# Altium PCB Mako DSP R1.5.PcbDoc (part 1 of 2)
Units mil, origin at the board's own origin, x right, y up, seen from the top; angles counter-clockwise.
Board outline 4440 x 2100 mil, 4 copper layers (Top Layer, GND, Power, Bottom Layer); 164 components, 146 nets, 633 pads, 238 vias.
Unrouted connection lines stored in the file: 45.
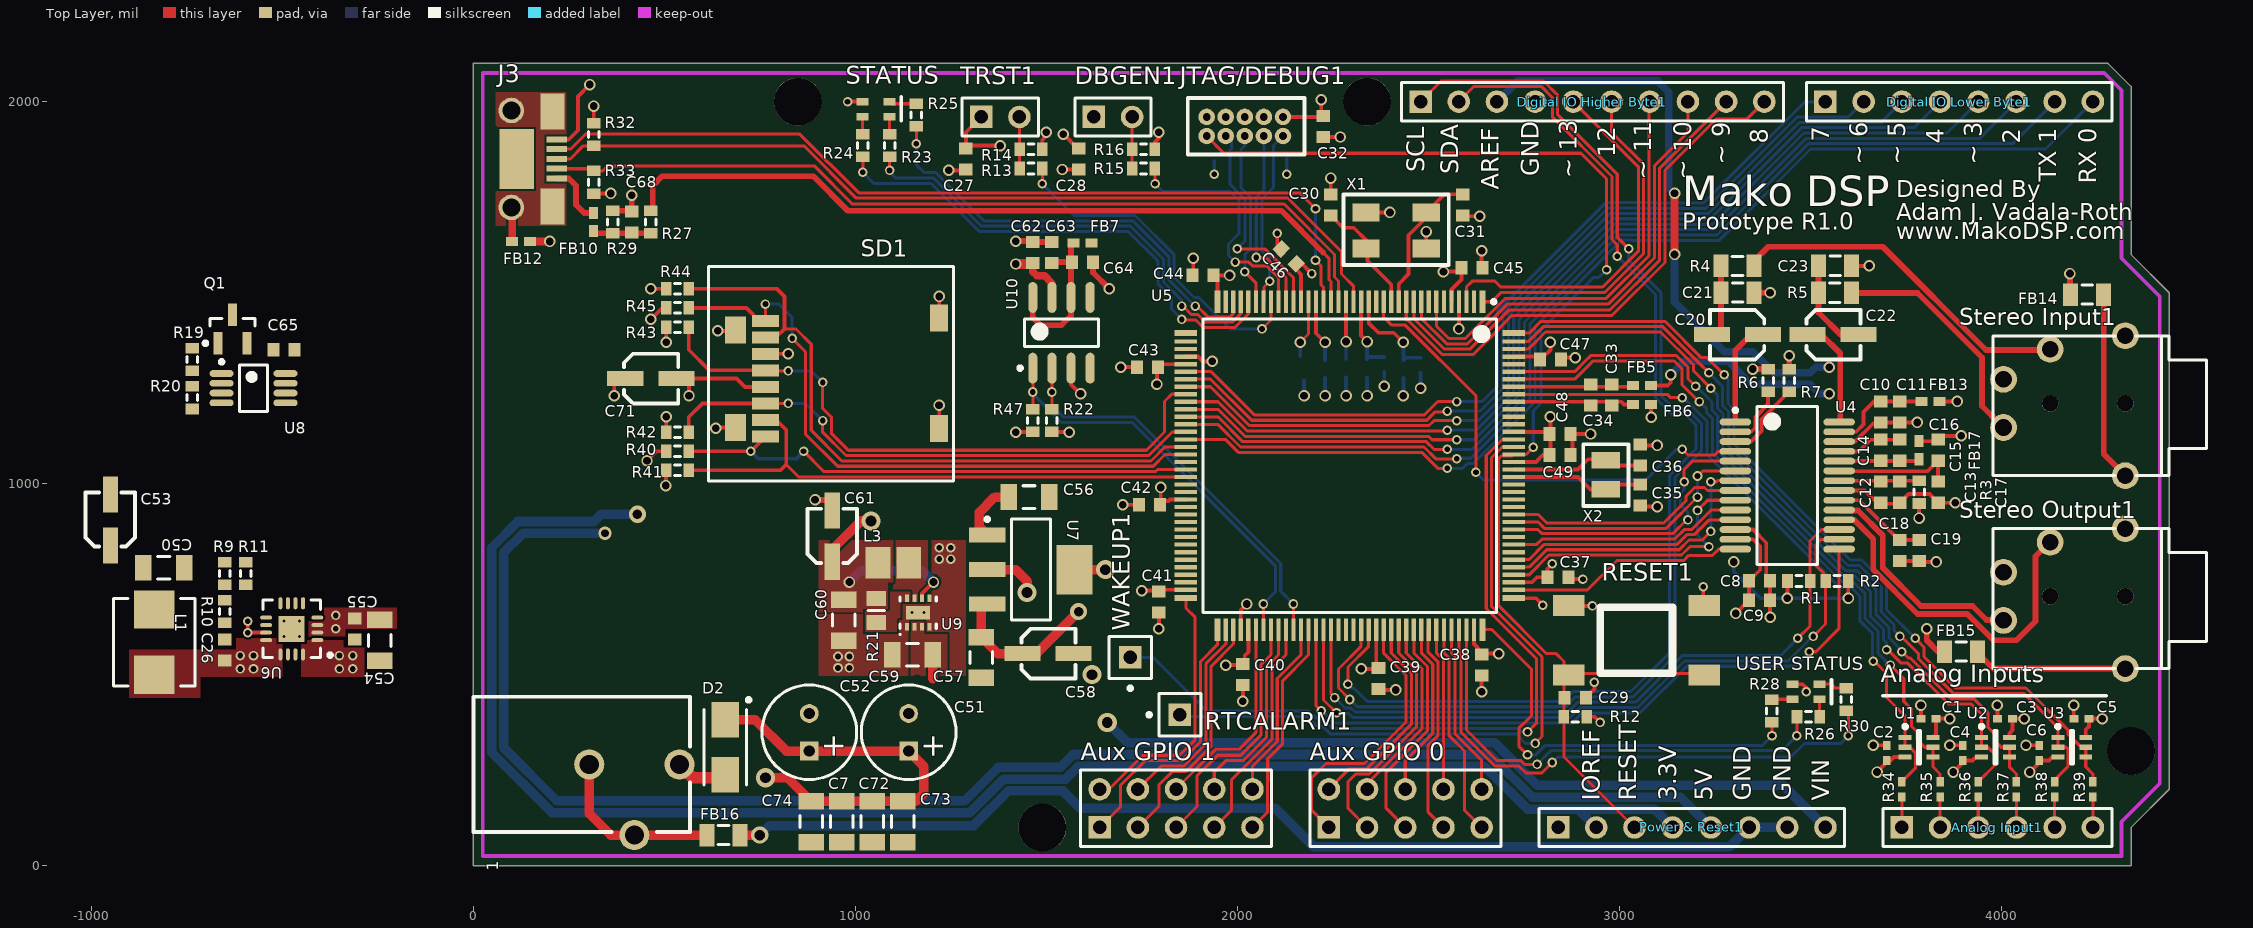
[diagram p0: Top Layer view]
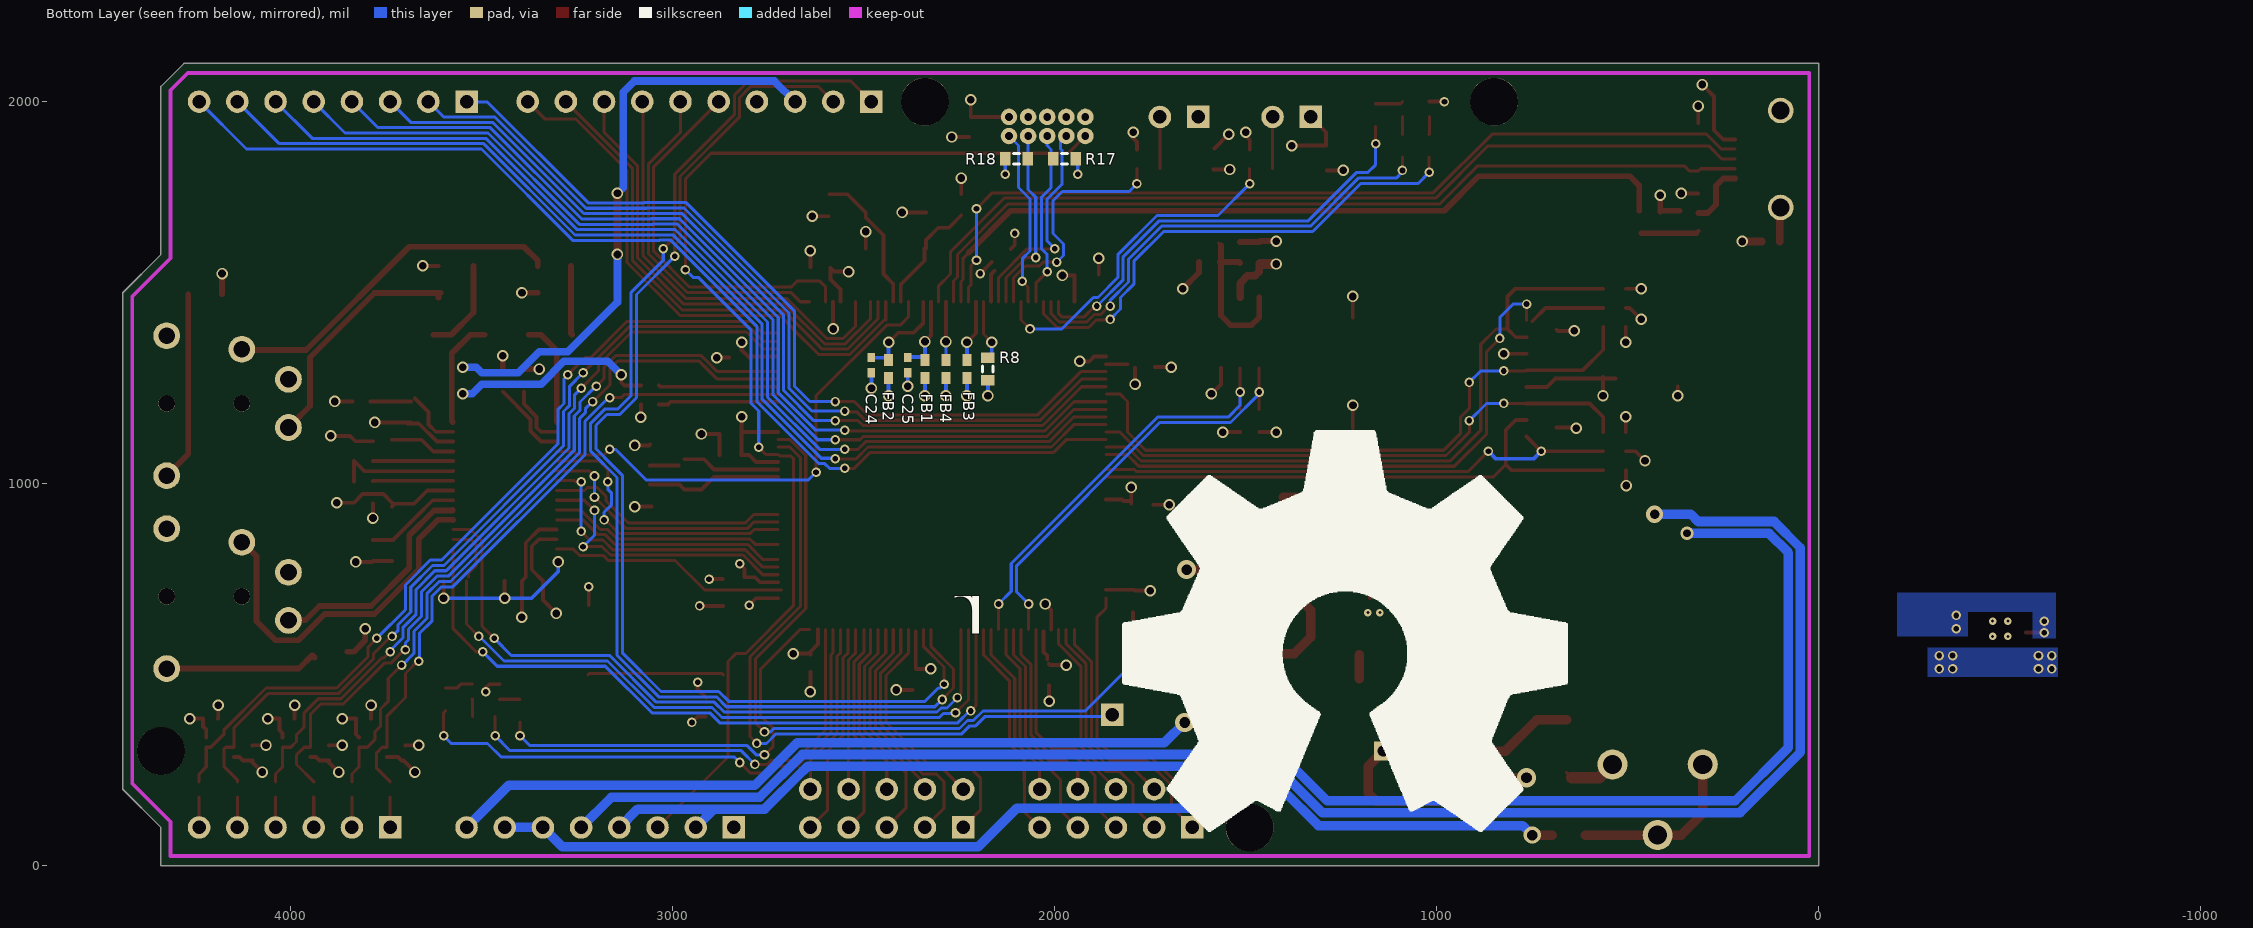
[diagram p1: Bottom Layer view, seen from below]
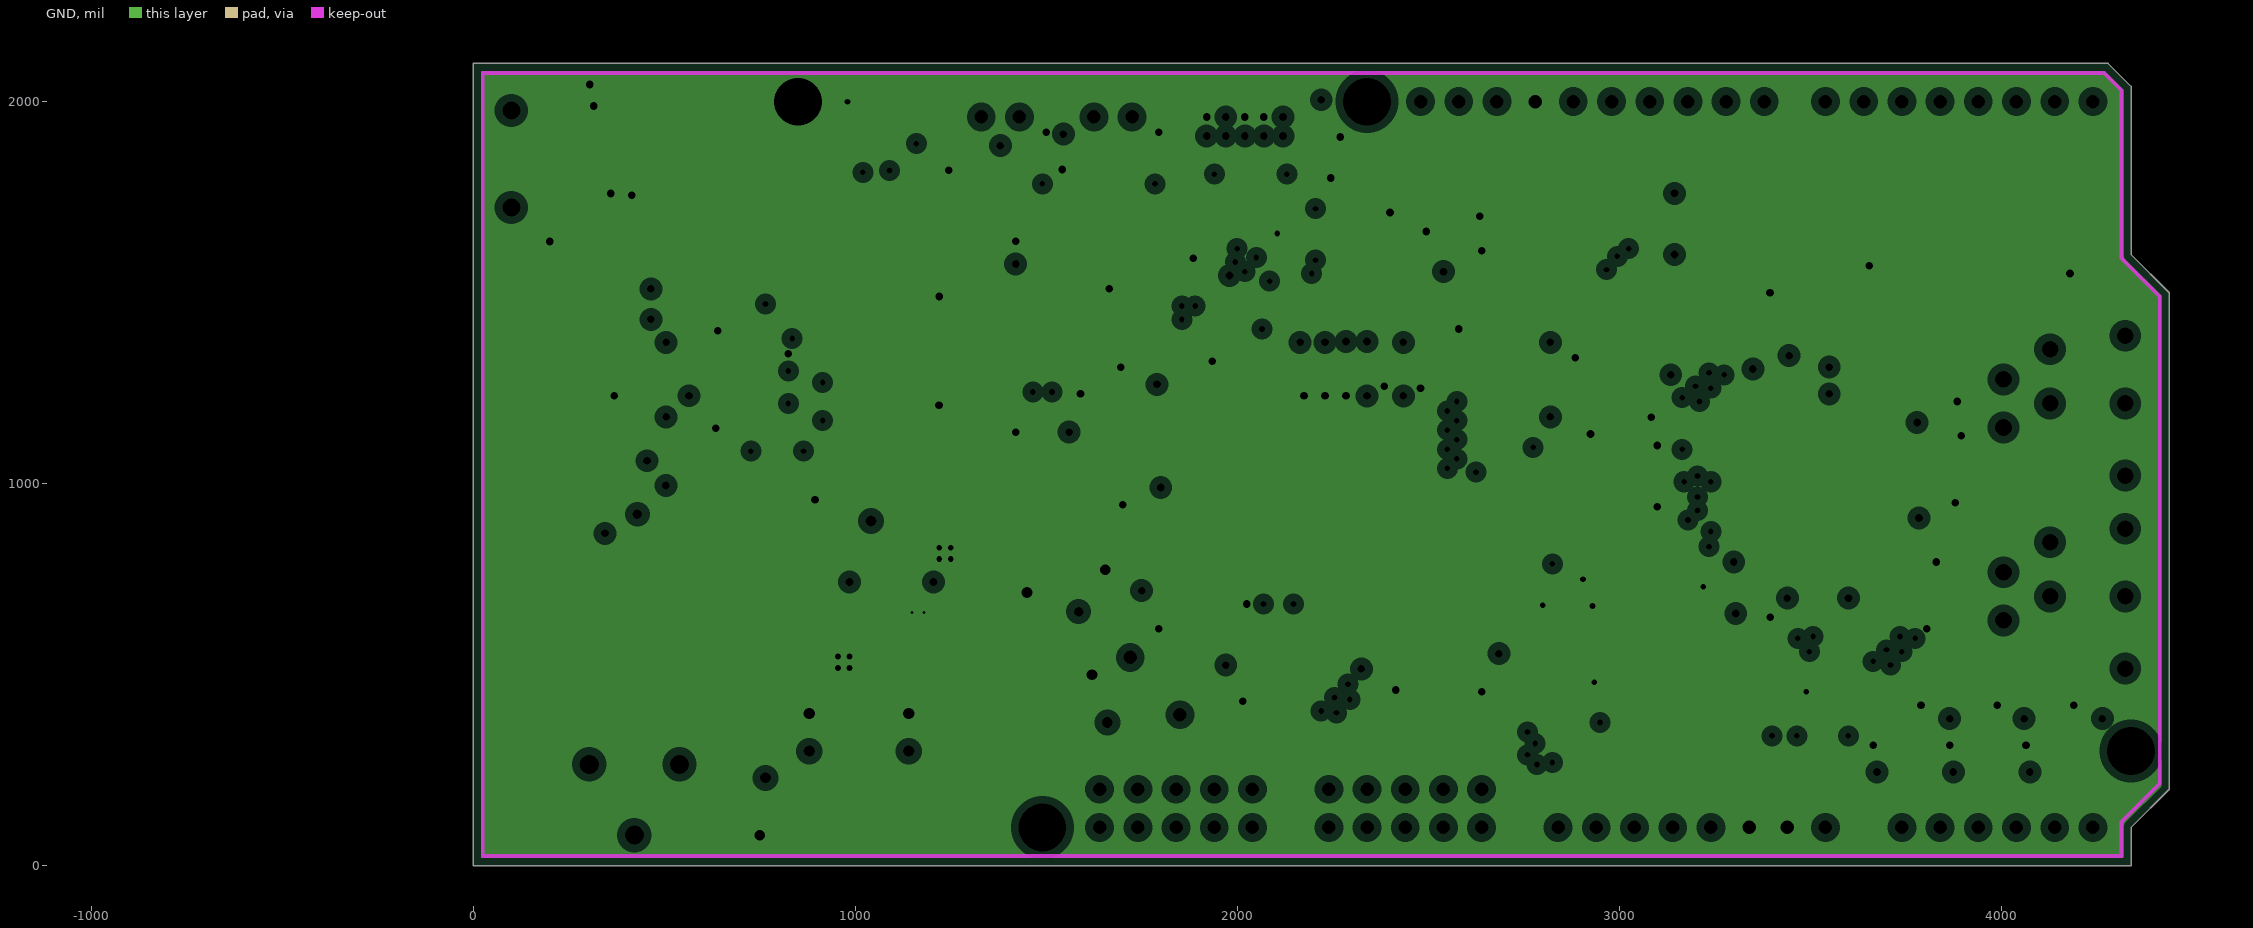
[diagram p2: GND, clearances drawn from the general rule]
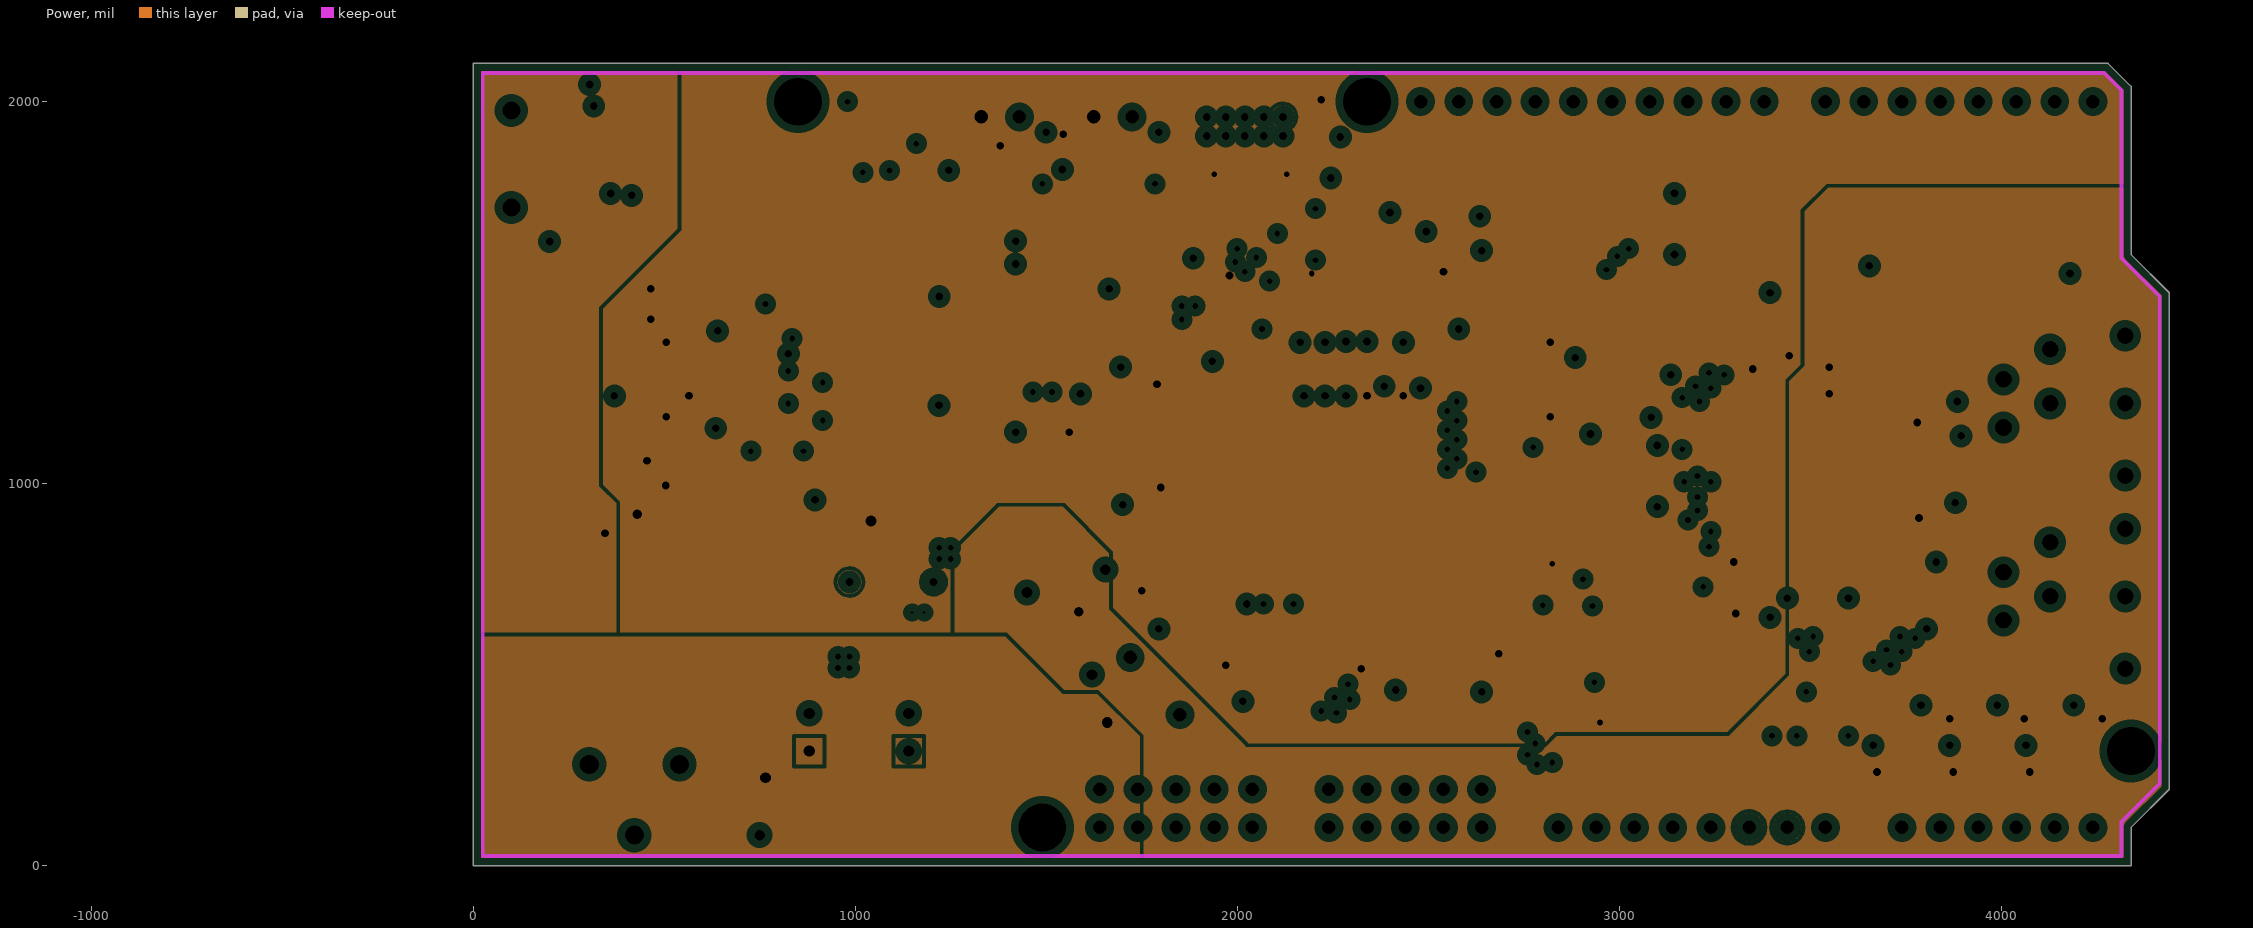
[diagram p3: Power, clearances drawn from the general rule]

## Layer stack, top to bottom
Top Layer: signal copper 1.4
Dielectric: core 12.6, FR-4, Dk 4.8
GND: plane copper 1.4, net GND
Dielectric: prepreg 12.6, FR-4, Dk 4.8
Power: plane copper 1.4, net (Multiple Nets)
Dielectric: core 12.6, FR-4, Dk 4.8
Bottom Layer: signal copper 1.4

## Board outline
0,0 0,2100 4280,2100 4340,2040 4340,1600 4440,1500 4440,200 4340,100 4340,0

## Design rules (kind name [scope] priority, off if disabled: settings)
Clearance [All] p1: gap=6
ComponentClearance [All] p1: gap=0 collisioncheckmode=3 verticalgap=10 showdistances=FALSE
DiffPairsRouting [All] p1: maxlimit=10 minlimit=10 mostfreqgap=10 maxuncoupledlength=500
FanoutControl Fanout_SOIC [(InComponent('U8') AND InComponent('U7'))] p3: bgadir=Out bgaviamode=Centered fanoutstyle=Staggered fanoutdirection=Alternating viagrid=1 // Fanout_SOIC (Default Rule)
FanoutControl Fanout_Small [All] p4: bgadir=Out bgaviamode=Centered fanoutstyle=Auto fanoutdirection=Alternating viagrid=1 // Fanout_Small (Default Rule)
HoleSize [All] p1: absolutevalues=TRUE maxlimit=120 minlimit=1 maxpercent=80.000 minpercent=20.000
MinimumSolderMaskSliver [All] p1 off: minsoldermaskwidth=10
PlaneClearance [All] p1: clearance=20
PlaneConnect [All] p1: planeconnectstyle=Direct reliefexpansion=20 reliefentries=4 reliefconductorwidth=10 reliefairgap=10
PolygonConnect [All] p1: connectstyle=Direct reliefconductorwidth=45 reliefentries=4 polygonreliefangle="90 Angle" airgapwidth=10
RoutingVias [All] p1: holewidth=15 width=25 viastyle="Through Hole" minholewidth=15 minwidth=25 maxholewidth=28 maxwidth=50
SilkToSilkClearance [All] p1 off: silktosilkclearance=10
SilkToSolderMaskClearance SilkscreenOverComponentPads [IsPad] p1 off: minsilkscreentomaskgap=10 clearancetoexposedcopper=TRUE
SolderMaskExpansion [All] p1: expansion=4
Width [All] p1: maxlimit=30 minlimit=6 preferedwidth=6 minimp=50.000000 maximp=50.000000 favimp=50.000000
18 further rules are at their usual default settings.

## Classes and differential pairs
component class "Mako DSP USBR1.2": C62 C63 C64 C68 FB7 FB10 FB12 J3 R22 R27 R29 R32 R33 R47 U10
component class "Mako DSP Main R1.2": C24 C25 C27 C28 C29 C30 C31 C32 C33 C34 C35 C36 C37 C38 C39 C40 C41 C42 C43 C44 C45 C46 C47 C48 C49 C71 DBGEN1 FB1 FB2 FB3 FB4 FB5 FB6 "ISP PGM" JTAG/DEBUG1 R8 R12 R13 R14 R15 R16 R17 R18 R23 R24 R25 R26 R28 R30 R40 R41 R42 R43 R44 R45 RESET RESET1 RTCALARM1 SD1 STATUS TRST1 U5 "USER STATUS" WAKEUP1 X1 X2
component class "Mako DSP Audio Codec R1.2": C8 C9 C10 C11 C12 C13 C14 C15 C16 C17 C18 C19 C20 C21 C22 C23 FB13 FB14 FB15 FB17 R1 R2 R3 R4 R5 R6 R7 "Stereo Input1" "Stereo Input?" "Stereo Output1" "Stereo Output?" U4
component class "Mako DSP Arduio IO R1.2": "Analog Input1" "Analog Input?" "Aux GPIO 0" "Aux GPIO 1" C1 C2 C3 C4 C5 C6 "Digital IO Higher Byte1" "Digital IO Higher Byte?" "Digital IO Lower Byte1" "Digital IO Lower Byte?" "Power & Reset1" "Power & Reset?" R34 R35 R36 R37 R38 R39 SSP? U1 U2 U3
component class "Mako DSP Power R1.3": 1 12VDC/VCCIN C7 C26 C50 C51 C52 C53 C54 C55 C56 C57 C58 C59 C60 C61 C65 C72 C73 C74 D2 D? FB16 L1 L3 Q1 R9 R10 R11 R19 R20 R21 U6 U7 U8 U9
differential pair USB0: +USB0_P -USB0_N

## Components (designator, comment, footprint, x,y, rotation, side; value= is the part's Value field where it differs from the comment)
1 "Center-positive 2.1 mm power jack" PJ-102AH 540,265 r90 top
"Analog Input1" "Arduino Leonardo Analog" "Arduino Leonardo Analog" 3740,100 r0 top locked
"Aux GPIO 0" "Header 5X2" HDR2X5 2240,100 r0 top locked
"Aux GPIO 1" "Header 5X2" HDR2X5 1640,100 r0 top locked
C1 "Cap Semi" 0402 3810,385 r0 top
C2 "Cap Semi" 0402 3700,295 r270 top
C3 "Cap Semi" 0402 4010,385 r0 top
C4 "Cap Semi" 0402 3900,295 r270 top
C5 "Cap Semi" 0402 4210,385 r0 top
C6 "Cap Semi" 0402 4100,295 r270 top
C7 "Cap Semi" C1206 965,115 r90 top
C8 "Cap Semi" 1608[0603] 3367.56,745.31 r180 top
C9 "Cap Semi" 1608[0603] 3367.56,695.31 r180 top
C10 "Cap Semi" 1608[0603] 3685,1187.56 r270 top
C11 "Cap Semi" 1608[0603] 3735,1187.56 r270 top
C12 "Cap Semi" 1608[0603] 3685,977.56 r90 top
C13 "Cap Semi" 1608[0603] 3735,977.56 r90 top
C14 "Cap Semi" 1608[0603] 3685,1087.56 r90 top
C15 "Cap Semi" 1608[0603] 3735,1087.56 r90 top
C16 "Cap Semi" 1608[0603] 3835,1087.56 r270 top
C17 "Cap Semi" 1608[0603] 3835,977.56 r90 top
C18 "Cap Semi" 1608[0603] 3735,825 r90 top
C19 "Cap Semi" 1608[0603] 3785,825 r90 top
C20 "Cap Semi" "Panasonic VS B" 3310,1390 r0 top
C21 "Cap Semi" "SM 0805 - gap trimmed" 3310,1500 r180 top
C22 "Cap Semi" "Panasonic VS B" 3560,1390 r180 top
C23 "Cap Semi" "SM 0805 - gap trimmed" 3565,1570 r180 top
C24 "Cap Semi" 0402 2480,1310 r90 bottom
C25 "Cap Semi" 0402 2385,1310 r90 bottom
C26 "Cap Semi" 1608[0603] -650,565 r90 top
C27 "Cap Semi" CAPC1608L 1290,1850 r90 top
C28 "Cap Semi" CAPC1608L 1585,1850 r90 top
C29 "Cap Semi" CAPC1608L 2885,440 r180 top
C30 "Cap Semi" 1608[0603] 2245,1730 r90 top
C31 "Cap Semi" 1608[0603] 2590,1730 r90 top
C32 "Cap Semi" CAPC1608L 2225,1935 r270 top
C33 "Cap Semi" 1608[0603] 2980,1232.05 r90 top
C34 "Cap Semi" 1608[0603] 2925,1232.05 r90 top
C35 "Cap Semi" 1608[0603] 3055,970 r90 top
C36 "Cap Semi" 1608[0603] 3055,1075 r270 top
C37 "Cap Semi" 1608[0603] 2840,755 r180 top
C38 "Cap Semi" 1608[0603] 2640,525 r90 top
C39 "Cap Semi" 1608[0603] 2370,490 r90 top
C40 "Cap Semi" 1608[0603] 2015,500 r90 top
C41 "Cap Semi" 1608[0603] 1795,690 r90 top
C42 "Cap Semi" 1608[0603] 1770,945 r0 top
C43 "Cap Semi" 1608[0603] 1765,1305 r0 top
C44 "Cap Semi" 1608[0603] 1910,1545 r0 top
C45 "Cap Semi" 1608[0603] 2615,1565 r180 top
C46 "Cap Semi" 1608[0603] 2135,1595 r315 top
C47 "Cap Semi" 1608[0603] 2820,1325 r180 top
C48 "Cap Semi" 1608[0603] 2845,1130 r180 top
C49 "Cap Semi" 1608[0603] 2845,1075 r180 top
C50 "Cap Semi" C1206 -810,780 r180 top
C51 "Cap Pol1" CAPPR2.5-6.3x5 1140,349.21 r90 top
C52 "Cap Pol1" CAPPR2.5-6.3x5 880,349.21 r90 top
C53 "Cap Semi" "Panasonic VS B" -950,905 r270 top
C54 "Cap Semi" C1206 -245,590 r90 top
C55 "Cap Semi" 1608[0603] -310,620 r90 top
C56 "Cap Semi" C1206 1455,965 r0 top
C57 "Cap Semi" C1206 1330,545 r270 top
C58 "Cap Semi" "Panasonic VS B" 1505,555 r180 top
C59 "Cap Semi" C1206 1150,552.5 r0 top
C60 "Cap Semi" C1206 970,642.5 r90 top
C61 "Cap Semi" "Panasonic VS B" 940,862.5 r270 top
C62 "Cap Semi" 1608[0603] 1465,1605 r270 top
C63 "Cap Semi" 1608[0603] 1515,1605 r270 top
C64 "Cap Semi" 1608[0603] 1595,1580 r180 top
C65 "Cap Semi" 1608[0603] -495,1350 r180 top
C68 "Cap Semi" 1608[0603] 415,1684.74 r270 top
C71 "Cap Semi" "Panasonic VS B" 465,1275 r180 top
C72 "Cap Semi" C1206 1045,115 r90 top
C73 "Cap Semi" C1206 1125,115 r90 top
C74 "Cap Semi" C1206 885,115 r90 top
D2 "PMEG4050EP" PMEG4050EP 660,310 r270 top
DBGEN1 "Header 2" HDR1X2 1625,1960 r0 top
"Digital IO Higher Byte1" "Arduino Leonardo High Byte" "Arduino Leonardo High Byte" 2480,2000 r0 top locked
"Digital IO Lower Byte1" "Arduino Leonardo Low Byte" "Arduino Leonardo Low Byte" 3540,2000 r0 top locked
FB1 "BLM15HG601SN1D" BLM18PG121SN1D 2340,1300 r90 bottom
FB2 "BLM15HG601SN1D" BLM18PG121SN1D 2435,1300 r90 bottom
FB3 "BLM15HG601SN1D" BLM18PG121SN1D 2230,1300 r270 bottom
FB4 "BLM15HG601SN1D" BLM18PG121SN1D 2285,1300 r270 bottom
FB5 "BLM15HG601SN1D" BLM18PG121SN1D 3060,1257.05 r180 top
FB6 "BLM15HG601SN1D" BLM18PG121SN1D 3060,1207.05 r180 top
FB7 "BLM15HG601SN1D" BLM18PG121SN1D 1595,1630 r0 top
FB10 "BLM15HG601SN1D" BLM18PG121SN1D 315,1684.74 r90 top
FB12 "BLM15HG601SN1D" BLM18PG121SN1D 125.58,1634.02 r0 top
FB13 "BLM15HG601SN1D" BLM18PG121SN1D 3815.16,1215.16 r0 top
FB14 "Ferrite" "SM 0805 - gap trimmed" 4225,1495 r180 top
FB15 "Ferrite" "SM 0805 - gap trimmed" 3895,560 r180 top
FB16 "Ferrite" "SM 0805 - gap trimmed" 655,80 r180 top
FB17 "BLM15HG601SN1D" BLM18PG121SN1D 3785,1087.56 r90 top
J3 "DX4R005J91R5100" "Micro USB Circular Holes Only" 60.57,1849.02 r270 top
JTAG/DEBUG1 "S9015E-05-ND" S9015E-05-ND 1920,1960 r0 top
L1 "Inductor" CIP0530LR3R3 -835,585 r90 top
L3 "Inductor" VLS252012T-2R2M1R3 1100,792.5 r180 top
"Power & Reset1" "Arduino Leonardo Power" "Arduino Leonardo Power" 2840,100 r0 top locked
Q1 "FDN340P" SOT23-3N -630,1405 r90 top
R1 "Res3" J1-0603 3470.16,745.16 r180 top
R2 "Res3" J1-0603 3570.16,745.16 r0 top
R3 "Res3" J1-0603 3785,977.56 r270 top
R4 "Res3" "SM 0805 - gap trimmed" 3310,1570 r0 top
R5 "Res3" "SM 0805 - gap trimmed" 3565,1500 r0 top
R6 "Res3" J1-0603 3390,1270 r270 top
R7 "Res3" J1-0603 3445,1270 r270 top
R8 "Res3" J1-0603 2175,1300 r90 bottom
R9 "Res3" J1-0603 -650,765 r270 top
R10 "Res3" J1-0603 -650,665 r270 top
R11 "Res3" J1-0603 -595,765 r90 top
R12 "Res3" J1-0603 2885,390 r0 top
R13 "Res3" J1-0603 1460,1825 r180 top
R14 "Res3" J1-0603 1460,1875 r180 top
R15 "Res3" J1-0603 1755,1825 r180 top
R16 "Res3" J1-0603 1755,1875 r180 top
R17 "Res3" J1-0603 1975,1850 r180 bottom
R18 "Res3" J1-0603 2100,1850 r0 bottom
R19 "Res3" J1-0603 -735,1325 r90 top
R20 "Res3" J1-0603 -735,1225 r90 top
R21 "Res3" RESC2012L 1055,667.5 r90 top
R22 "Res3" J1-0603 1515,1165 r90 top
R23 "Res3" J1-0603 1090,1885 r90 top
R24 "Res3" J1-0603 1020,1885 r270 top
R25 "Res3" J1-0603 1160,1965 r90 top
R26 "Res3" J1-0603 3495,390 r0 top
R27 "Res3" J1-0603 465,1684.74 r90 top
R28 "Res3" J1-0603 3400,405 r270 top
R29 "Res3" J1-0603 365,1684.74 r90 top
R30 "Res3" J1-0603 3595,435 r90 top
R32 "Res3" J1-0603 315.58,1914.02 r90 top
R33 "Res3" J1-0603 315.58,1789.02 r270 top
R34 "Res3" "0402 - duplicate" 3740,200 r90 top
R35 "Res3" "0402 - duplicate" 3840,200 r90 top
R36 "Res3" "0402 - duplicate" 3940,200 r90 top
R37 "Res3" "0402 - duplicate" 4040,200 r90 top
R38 "Res3" "0402 - duplicate" 4140,200 r90 top
R39 "Res3" "0402 - duplicate" 4240,200 r90 top
R40 "Res3" J1-0603 535,1085 r0 top
R41 "Res3" J1-0603 535,1035 r0 top
R42 "Res3" J1-0603 535,1135 r0 top
R43 "Res3" J1-0603 535,1410 r0 top
R44 "Res3" J1-0603 535,1510 r0 top
R45 "Res3" J1-0603 535,1460 r0 top
R47 "Res3" J1-0603 1465,1165 r90 top
RESET1 "Tactile Switch" TL3301 3045,590 r90 top
RTCALARM1 "Socket" PIN1 1850,395 r90 top
SD1 "JAE SJ107021" "JAE SJ107021" 1220,1274.53 r0 top
STATUS "APTF1616SEEZGQBDC" "RGB LED APTF1616SEEZGQBDC" 1090,2000 r180 top
"Stereo Input1" "CUI 43515TS" "CUI SJ-43515TS" 4325,1210 r180 top
"Stereo Output1" "CUI 43515TS" "CUI SJ-43515TS" 4325,705 r180 top
TRST1 "Header 2" HDR1X2 1330,1960 r0 top
U1 "BAV70S SOT-363" BAV70S_SOT363 3785,310 r0 top
U2 "BAV70S SOT-363" BAV70S_SOT363 3985,310 r0 top
U3 "BAV70S SOT-363" BAV70S_SOT363 4185,310 r0 top
U4 "WM8778" WM8778 3440,995 r0 top
U5 "LPC4330FBD144" SOT486-1_V 2295,1047.05 r270 top
U6 "MIC24085" MIC24085-AYML -475,620 r180 top
U7 "TLV117113" TLV117112 1460,775 r0 top
U8 "Ti LM358 SOP" LM358 -575,1250 r0 top
U9 "TPS62162SOP" DSG8-1600X900TP 1165,662.5 r90 top
U10 "LM3525" LM3525 1540,1395 r90 top
"USER STATUS" "APTF1616SEEZGQBDC" "RGB LED APTF1616SEEZGQBDC" 3525,475 r180 top
WAKEUP1 "Socket" PIN1 1720,545 r180 top
X1 "ABM3B-12.000MHZ-B2-T" ABM3B-12.000MHZ-B2-T 2495,1710 r180 top
X2 "ABS07-32.768KHZ-T" ABS07-32.768KHZ-T 2965,985 r90 top

## Footprints (in the part's own frame and the unit in brackets; to place one, negate y for a bottom-side part, rotate by r counter-clockwise, add the part's x,y. Pads: shape width x height; smd on the part's side, far side on the other; paste and mask are expansions set on the pad)
0402 [mm] "Chip Capacitor, Body 1.0x0.5mm, IPC High Density"
  rect 0.6x0.5 smd: 1(-0.5,0) 2(0.5,0)
  body extent -0.55,-0.3 0.55,0.3, height 1.3
"0402 - duplicate" [mm] "Chip Capacitor, Body 1.0x0.5mm, IPC High Density"
  rect 0.6x0.5 smd: 1(-0.5,0) 2(0.5,0)
  body extent -0.55,-0.3 0.55,0.3, height 1.3
1608[0603] [mm] "Chip Capacitor, Body 1.6x0.8mm, IPC High Density"
  rect 0.8x0.9 smd: 1(-0.7,0) 2(0.7,0)
  body extent -0.87,-0.48 0.87,0.48, height 1.3
ABM3B-12.000MHZ-B2-T [mm] "ABM3B-12.000MHZ-B2-T 12MHZ Crystam Oscillator"
  rect 1.8x1.2 smd: 1(0,0) 2(4,0) 3(4,2.4) 4(0,2.4)
  silkscreen extent -1.5,-1.2 5.5,3.5
ABS07-32.768KHZ-T [mm] "ABS07-32.768KHZ-T Crystal Oscillator"
  rect 1.1x1.9 smd: 1(0,0) 2(1.95,0)
  silkscreen extent -1.1,-1.5 3,1.5
"Arduino Leonardo Analog" [mm] "Connector; Header; 6 Position"
  rect 1.5x1.5 hole 0.9: 1(0,0)
  round 1.5 hole 0.9: 2(2.54,0) 3(5.08,0) 4(7.62,0) 5(10.16,0) 6(12.7,0)
  silkscreen extent -1.27,-1.27 13.97,1.27
"Arduino Leonardo High Byte" [mm]
  rect 1.5x1.5 hole 0.9: 1(0,0)
  round 1.5 hole 0.9: 2(2.54,0) 3(5.08,0) 4(7.62,0) 5(10.16,0) 6(12.7,0) 7(15.24,0) 8(17.78,0) 9(20.32,0) 10(22.86,0)
  silkscreen extent -1.27,-1.27 24.13,1.27
"Arduino Leonardo Low Byte" [mm] "Connector; Header; 8 Position"
  rect 1.5x1.5 hole 0.9: 1(0,0)
  round 1.5 hole 0.9: 2(2.54,0) 3(5.08,0) 4(7.62,0) 5(10.16,0) 6(12.7,0) 7(15.24,0) 8(17.78,0)
  silkscreen extent -1.27,-1.27 19.05,1.27
"Arduino Leonardo Power" [mm] "Connector; Header; 8 Position"
  rect 1.5x1.5 hole 0.9: 1(0,0)
  round 1.5 hole 0.9: 2(2.54,0) 3(5.08,0) 4(7.62,0) 5(10.16,0) 6(12.7,0) 7(15.24,0) 8(17.78,0)
  silkscreen extent -1.27,-1.27 19.05,1.27
BAV70S_SOT363 [mm] "SOT23, 6-Leads, Body 2.2x2.2mm (max), Pitch 0.65mm, IPC Medium Density"
  rect 0.85x0.35 smd: 1(-0.925,0.65) 2(-0.925,0) 3(-0.925,-0.65) 4(0.925,-0.65) 5(0.925,0) 6(0.925,0.65)
  silkscreen extent -1.05,-1.1 0.1,1.5, body extent -0.67,-1.1 0.67,1.1, height 1.1
BLM18PG121SN1D [mm] "Chip Inductor, 2-Leads, Body 1.0x0.5mm, IPC Medium Density"
  rect 0.8x0.6 smd: 1(-0.6,0) 2(0.6,0)
  body extent -0.52,-0.28 0.53,0.27, height 0.6
C1206 [mm] "Chip Capacitor, Body 3.2x1.6mm, IPC High Density"
  rect 1.1x1.7 smd: 1(-1.35,0) 2(1.35,0)
  silkscreen extent -0.4,-0.75 0.4,0.75, body extent -1.7,-0.9 1.7,0.9, height 1.3
CAPC1608L [mm] "Chip Capacitor, Body 1.6x0.8mm, IPC High Density"
  rect 0.8x0.9 smd: 1(-0.7,0) 2(0.7,0)
  body extent -0.87,-0.48 0.87,0.48, height 0.85
CAPPR2.5-6.3x5 [mm] "Capacitor, Electrolytic, Radial; Body 6.3 x 5 mm (Dia.xH typ); Pin Spacing 2.5 mm (typ)"
  rect 1.25x1.25 hole 0.75: 1(-1.25,0)
  round 1.25 hole 0.75: 2(1.25,0)
  silkscreen extent -3.15,-3.15 3.15,3.15
CIP0530LR3R3 [mm] "Precision Wire Wound Inductor, 2-Leads, Body 5.58x5.30mm, IPC Medium Density"
  rect 2.55x2.7 smd: 1(-2.175,0) 2(2.175,0)
  silkscreen extent -2.9,-2.7 2.9,2.7, body extent -2.88,-2.7 2.88,2.7, height 2.29
"CUI SJ-43515TS" [mm]
  round 1.778 hole 1.1: 1(8.1,1.6) 3(8.1,-1.6) 4(5,-3.6) 5(0,4.8) 6(0,-4.5)
  round 1.1 hole 1.1: ""(0,0) ""(5,0)
  silkscreen extent -5.4,-4.5 8.8,4.8
DSG8-1600X900TP [mm] "SON, 8-Leads, Body 2x2mm, Pitch 0.5mm, Thermal Pad 1.6x0.9mm, TI Recommended"
  rect 0.5x0.28 smd paste-0.14 mask+0.07: 1(-0.95,0.75) 2(-0.95,0.25) 3(-0.95,-0.25) 4(-0.95,-0.75) 5(0.95,-0.75) 6(0.95,-0.25) 7(0.95,0.25) 8(0.95,0.75)
  rect 0.9x1.6 smd paste-0.45 mask+0.07: 9(0,0)
  silkscreen extent -1.5,-1.2 1.05,1.25, body extent -1.05,-1.05 1.05,1.05, height 0.8
HDR1X2 [mm] "Connector; Header; 2 Position"
  rect 1.5x1.5 hole 0.9: 1(0,0)
  round 1.5 hole 0.9: 2(2.54,0)
  silkscreen extent -1.27,-1.27 3.81,1.27
HDR2X5 [mm] "Connector; Header; 5x2 Position"
  rect 1.5x1.5 hole 0.9: 1(0,0)
  round 1.5 hole 0.9: 2(0,2.54) 3(2.54,0) 4(2.54,2.54) 5(5.08,0) 6(5.08,2.54) 7(7.62,0) 8(7.62,2.54) 9(10.16,0) 10(10.16,2.54)
  silkscreen extent -1.27,-1.27 11.43,3.81
J1-0603 [mm] "Chip Resistor, Body 1.6x0.8mm, IPC High Density"
  rect 0.7x0.9 smd: 1(-0.75,0) 2(0.75,0)
  silkscreen extent -0.2,-0.35 0.2,0.35, body extent -0.85,-0.48 0.85,0.48, height 0.9
"JAE SJ107021" [mm] "MicroSD card socket"
  rect 1.8x0.8 smd: 1(-11.55,-3.85) 2(-11.55,-2.75) 3(-11.55,-1.65) 4(-11.55,-0.55) 5(-11.55,0.55) 6(-11.55,1.65) 7(-11.55,2.75) 8(-11.55,3.85)
  rect 1.2x1.8 smd: 9(0,-3.3) 10(0,4.05)
  rect 1.4x1.8 smd: 11(-13.55,-3.25) 12(-13.55,3.25)
  silkscreen extent -15.35,-6.8 0.95,7.45, body extent -15.25,-6.75 1,7.5, height 2
LM358 [mm] "TSOP, 8-Leads, Body 3.00x3.00mm, Pitch 0.65mm, IPC Medium Density"
  oval 1.6x0.45 smd: 1(-2.125,0.975) 2(-2.125,0.325) 3(-2.125,-0.325) 4(-2.125,-0.975) 5(2.125,-0.975) 6(2.125,-0.325) 7(2.125,0.325) 8(2.125,0.975)
  silkscreen extent -2.25,-1.55 0.92,1.87, body extent -1.55,-1.55 1.55,1.55, height 1.1
LM3525 [mm]
  oval 2.05x0.6 smd: 1(-2.35,1.905) 2(-2.35,0.635) 3(-2.35,-0.635) 4(-2.35,-1.905) 5(2.35,-1.905) 6(2.35,-0.635) 7(2.35,0.635) 8(2.35,1.905)
  silkscreen extent -2.47,-2.45 0.92,2.88, body extent -1.95,-2.45 1.95,2.45, height 1.45
MIC24085-AYML [mm] "QFN, 16-Leads, Body 3.25x3.25mm, Pitch 0.50mm, Thermal Pad 1.73x1.73mm, IPC Medium Density"
  oval 0.8x0.25 smd: 1(-1.7,0.75) 2(-1.7,0.25) 3(-1.7,-0.25) 4(-1.7,-0.75) 9(1.7,-0.75) 10(1.7,-0.25) 11(1.7,0.25) 12(1.7,0.75)
  oval 0.25x0.8 smd: 5(-0.75,-1.7) 6(-0.25,-1.7) 7(0.25,-1.7) 8(0.75,-1.7) 13(0.75,1.7) 14(0.25,1.7) 15(-0.25,1.7) 16(-0.75,1.7)
  rect 1.73x1.73 smd: 17(0,0)
  silkscreen extent -2.68,-1.9 1.9,1.9, body extent -1.75,-1.75 1.75,1.75, height 0.85
"Micro USB Circular Holes Only" [mm]
  rect 0.4x1.35 smd: 1(1.275,4.025) 2(0.625,4.025) 3(-0.025,4.025) 4(-0.675,4.025) 5(-1.325,4.025)
  rect 2.4x1.6 smd: 6(3.125,3.75) 9(-3.175,3.75)
  round 1.7 hole 1.2: 7(3.2,1) 8(-3.25,1)
  rect 4x2.3 smd: GND(-0.025,1.35)
  body extent -4.1,-1.64 4.1,3.79, height 2.73
"Panasonic VS B" [mm]
  rect 2.4x1 smd: 1(1.7,0) 2(-1.7,0)
  silkscreen extent -1.83,-1.65 1.78,1.65
PIN1 [mm] "Connector; Plug"
  rect 1.5x1.5 hole 0.9: 1(0,0)
  silkscreen extent -1.4,-1.4 1.4,2.17
PJ-102AH [mm] "Center positive 2.1 mm power jack"
  round 2 hole 1.27: 1(0,0) 2(0,6) 3(-4.7,3)
  silkscreen extent -4.5,-0.7 4.5,13.7, body extent -5.8,-0.7 4.5,13.7, height 11
PMEG4050EP [mm] "PMEG4050EP NXP SMD Schottky Diode"
  rect 2.35x1.85 smd: 1(-1.825,0) 2(1.825,0)
  silkscreen extent -3.27,-1.4 2.5,1.68, body extent -2.5,-1.35 2.5,1.35, height 1.1
RESC2012L [mm] "Chip Resistor, Body 2.0x1.3mm, IPC High Density"
  rect 1x1.3 smd: 1(-0.8,0) 2(0.8,0)
  silkscreen extent 0,-0.55 0,0.55, body extent -1.07,-0.7 1.07,0.7, height 0.65
"RGB LED APTF1616SEEZGQBDC" [mm] "RGB LED"
  rect 0.8x0.5 smd: 1(1.8,0) 2(0,0) 3(0,1) 4(1.8,1)
  silkscreen extent -0.77,-0.3 -0.77,1.28
S9015E-05-ND [mm] "10 Pin Cortex JTAG Debug Header"
  round 1.1 hole 0.508: 1(5.08,0) 2(5.08,-1.27) 3(3.81,0) 4(3.81,-1.27) 5(2.54,0) 6(2.54,-1.27) 7(1.27,0) 8(1.27,-1.27) 9(0,0) 10(0,-1.27)
  round 0.5 on Top Overlay: 1(7,0.8)
  silkscreen extent -1.25,-2.5 6.5,1.25
"SM 0805 - gap trimmed" [mm]
  rect 1x1.5 smd: 1(-1.1,0) 2(1.1,0)
  silkscreen extent -0.36,-0.64 0.35,0.63
SOT23-3N [mm] "SOT23, 3-Leads, Body 2.9x1.3mm, Pitch 0.95mm, Lead Span 2.5mm, IPC Medium Density"
  rect 1.5x0.6 smd: 1(-0.95,0.95) 2(-0.95,-0.95) 3(0.95,0)
  silkscreen extent -1.07,-1.5 0.7,1.92, body extent -0.7,-1.5 0.7,1.5, height 1.1
SOT486-1_V [mm] "Thin QFP, 144-Leads, Body 20x20mm, Pitch 0.5mm, NXP Recommended"
  rect 1.5x0.4 smd: 1(-10.9,8.81) 36(-10.9,-8.81) 73(10.9,-8.81) 108(10.9,8.81)
  rect 1.5x0.28 smd: 2(-10.9,8.25) 3(-10.9,7.75) 4(-10.9,7.25) 5(-10.9,6.75) 6(-10.9,6.25) 7(-10.9,5.75) 8(-10.9,5.25) 9(-10.9,4.75) 10(-10.9,4.25) 11(-10.9,3.75) 12(-10.9,3.25) 13(-10.9,2.75) 14(-10.9,2.25) 15(-10.9,1.75) 16(-10.9,1.25) 17(-10.9,0.75) 18(-10.9,0.25) 19(-10.9,-0.25) 20(-10.9,-0.75) 21(-10.9,-1.25) 22(-10.9,-1.75) 23(-10.9,-2.25) 24(-10.9,-2.75) 25(-10.9,-3.25) 26(-10.9,-3.75) 27(-10.9,-4.25) 28(-10.9,-4.75) 29(-10.9,-5.25) 30(-10.9,-5.75) 31(-10.9,-6.25) 32(-10.9,-6.75) 33(-10.9,-7.25) 34(-10.9,-7.75) 35(-10.9,-8.25) 74(10.9,-8.25) 75(10.9,-7.75) 76(10.9,-7.25) 77(10.9,-6.75) 78(10.9,-6.25) 79(10.9,-5.75) 80(10.9,-5.25) 81(10.9,-4.75) 82(10.9,-4.25) 83(10.9,-3.75) 84(10.9,-3.25) 85(10.9,-2.75) 86(10.9,-2.25) 87(10.9,-1.75) 88(10.9,-1.25) 89(10.9,-0.75) 90(10.9,-0.25) 91(10.9,0.25) 92(10.9,0.75) 93(10.9,1.25) 94(10.9,1.75) 95(10.9,2.25) 96(10.9,2.75) 97(10.9,3.25) 98(10.9,3.75) 99(10.9,4.25) 100(10.9,4.75) 101(10.9,5.25) 102(10.9,5.75) 103(10.9,6.25) 104(10.9,6.75) 105(10.9,7.25) 106(10.9,7.75) 107(10.9,8.25)
  rect 0.4x1.5 smd: 37(-8.81,-10.9) 72(8.81,-10.9) 109(8.81,10.9) 144(-8.81,10.9)
  rect 0.28x1.5 smd: 38(-8.25,-10.9) 39(-7.75,-10.9) 40(-7.25,-10.9) 41(-6.75,-10.9) 42(-6.25,-10.9) 43(-5.75,-10.9) 44(-5.25,-10.9) 45(-4.75,-10.9) 46(-4.25,-10.9) 47(-3.75,-10.9) 48(-3.25,-10.9) 49(-2.75,-10.9) 50(-2.25,-10.9) 51(-1.75,-10.9) 52(-1.25,-10.9) 53(-0.75,-10.9) 54(-0.25,-10.9) 55(0.25,-10.9) 56(0.75,-10.9) 57(1.25,-10.9) 58(1.75,-10.9) 59(2.25,-10.9) 60(2.75,-10.9) 61(3.25,-10.9) 62(3.75,-10.9) 63(4.25,-10.9) 64(4.75,-10.9) 65(5.25,-10.9) 66(5.75,-10.9) 67(6.25,-10.9) 68(6.75,-10.9) 69(7.25,-10.9) 70(7.75,-10.9) 71(8.25,-10.9) 110(8.25,10.9) 111(7.75,10.9) 112(7.25,10.9) 113(6.75,10.9) 114(6.25,10.9) 115(5.75,10.9) 116(5.25,10.9) 117(4.75,10.9) 118(4.25,10.9) 119(3.75,10.9) 120(3.25,10.9) 121(2.75,10.9) 122(2.25,10.9) 123(1.75,10.9) 124(1.25,10.9) 125(0.75,10.9) 126(0.25,10.9) 127(-0.25,10.9) 128(-0.75,10.9) 129(-1.25,10.9) 130(-1.75,10.9) 131(-2.25,10.9) 132(-2.75,10.9) 133(-3.25,10.9) 134(-3.75,10.9) 135(-4.25,10.9) 136(-4.75,10.9) 137(-5.25,10.9) 138(-5.75,10.9) 139(-6.25,10.9) 140(-6.75,10.9) 141(-7.25,10.9) 142(-7.75,10.9) 143(-8.25,10.9)
  silkscreen extent -11.02,-9.75 9.75,9.75, body extent -10,-10 10,10, height 1.6
TL3301 [mm]
  rect 1.4x2.1 smd: 1(-2.3,4.5) 1(-2.3,-4.5) 2(2.3,4.5) 2(2.3,-4.5)
  silkscreen extent -2.2,-2.4 2.2,2.4
TLV117112 [mm] "SOT223, 4-Leads, Body 6.7x7.3mm (max), Pitch 2.30mm, IPC Medium Density"
  rect 2.4x1 smd: 1(-2.9,2.3) 2(-2.9,0) 3(-2.9,-2.3)
  rect 2.4x3.3 smd: 4(2.9,0)
  silkscreen extent -3.02,-3.35 1.3,3.47, body extent -1.85,-3.35 1.85,3.35, height 1.8
VLS252012T-2R2M1R3 [mm] "Precision Wire Wound Inductor, 2-Leads, Body 2.5x2.0mm, IPC Medium Density"
  rect 1.65x2.1 smd: 1(-1.025,0) 2(1.025,0)
  body extent -1.3,-1.05 1.3,1.05, height 1.2
WM8778 [mm] "SOP, 28 Pin Wolfson Audio WM8778 Audio Codec"
  oval 2.1x0.45 smd: 1(-3.45,4.225) 2(-3.45,3.575) 3(-3.45,2.925) 4(-3.45,2.275) 5(-3.45,1.625) 6(-3.45,0.975) 7(-3.45,0.325) 8(-3.45,-0.325) 9(-3.45,-0.975) 10(-3.45,-1.625) 11(-3.45,-2.275) 12(-3.45,-2.925) 13(-3.45,-3.575) 14(-3.45,-4.225) 15(3.45,-4.225) 16(3.45,-3.575) 17(3.45,-2.925) 18(3.45,-2.275) 19(3.45,-1.625) 20(3.45,-0.975) 21(3.45,-0.325) 22(3.45,0.325) 23(3.45,0.975) 24(3.45,1.625) 25(3.45,2.275) 26(3.45,2.925) 27(3.45,3.575) 28(3.45,4.225)
  silkscreen extent -3.57,-5.25 2,5.25, body extent -2.8,-5.25 2.8,5.25, height 2

## Part data
1: library part PWR2.5, "Power jack"
"Aux GPIO 0" "Aux GPIO 1": "Header, 5-Pin, Dual row"
C1 C2 C3 C4 C5 C6 C7 C8 C9 C10 C11 C12 C13 C14 C15 C16 C17 C18 C19 C20 C21 C22 C23 C24 C25 C26 C27 C28 C29 C30 C31 C32 C33 C34 C35 C36 C37 C38 C39 C40 C41 C42 C43 C44 C45 C46 C47 C48 C49 C50 C53 C54 C55 C56 C57 C58 C59 C60 C61 C62 C63 C64 C65 C68 C71 C72 C73 C74: "Capacitor (Semiconductor SIM Model)"
C51 C52: "Polarized Capacitor (Radial)"
D2: library part Diode, "Default Diode"
DBGEN1 TRST1: "Header, 2-Pin"
FB14 FB15 FB16: library part Inductor, "Inductor"
J3: library part "Micro USB", "Micro USB Jack B"
Q1: "P-Channel MOSFET"
R1 R2 R3 R4 R5 R6 R7 R8 R9 R10 R11 R12 R13 R14 R15 R16 R17 R18 R19 R20 R21 R22 R23 R24 R25 R26 R27 R28 R29 R30 R32 R33 R34 R35 R36 R37 R38 R39 R40 R41 R42 R43 R44 R45 R47: "Resistor"
SD1: library part "JAE SJ107021 microSD Card Socket"
STATUS "USER STATUS": library part "RGB LED APTF1616SEEZGQBDC", "RGB LED"
U5: "32-bit ARM Cortex-M4 MCU, 264 kB SRAM, 2 HS USB with on-chip PHY, Ethernet, CAN, AES, SPIFI, SGPIO, SCT, 144-Pin LQFP"
U7: library part TLV117112, "Linear Regulator"
U8: library part LM358_Symbol
X2: "ABS07-32.768KHZ-T RTC Crystal Oscillator"

## Free pads (board coordinates)
  round 125.1 hole 125.1: ""(850,2000) ""(1490,100) ""(2340,2000) ""(4340,300)

## Via types
v1: diameter 25, hole 15, Top Layer to Bottom Layer, 111 vias
v2: diameter 30, hole 20, Top Layer to Bottom Layer, 111 vias
v3: diameter 50, hole 28, Top Layer to Bottom Layer, 6 vias
v4: diameter 19.68, hole 7.87, Top Layer to Bottom Layer, 6 vias
v5: diameter 45, hole 25, Top Layer to Bottom Layer, 2 vias
v6: diameter 45, hole 28, Top Layer to Bottom Layer, 1 vias
v7: diameter 35, hole 20, Top Layer to Bottom Layer, 1 vias

## Nets (pads, with @x,y where several pads share a name; then routed paths per layer and width w, separated by ;. In a path a pad name is that pad's centre, name@x,y a point inside that pad or via, vN(x,y) a via of type N, cw(c..) or ccw(c..) an arc to the next point about the centre after c; other vN are vias at no path point)
5VCC: "Power & Reset1.5" C50.2 C53.1 C56.1 C59.2 C62.2 C65.1 L1.2 Q1.2 R9.2 R10.1 U6.9 U7.1 U8.8 U9.2 U9.3 U10.7 | length 4533.8
  Top Layer w20: C62.2@1465,1577.44 1465,1555 1476.13,1543.87 1496.13,1543.87 1515,1525 U10.7@1515,1487.52
  Top Layer w25: 1203.15,489.13 C59.2@1203.15,552.5 ; U7.1@1345.83,865.55 1325,886.38 1325,925 1365,965 C56.1@1401.85,965 ; v2(1420,1575) C62.2@1462.56,1575
  Bottom Layer w25: v7(345,870) 130,870 79.5,819.5 79.5,309.34 218.84,170 1287.32,170 1375,257.68 1537.68,257.68 1571,291 2660.76,291 2772.76,179 2789.94,179 ; 2789.97,179.03 2890.03,179.03 ; 2890.06,179 3007.24,179 ; 3007.27,179.03 3160.97,179.03 3240,100
ADC_RX_MCLK: U4.9 U5.112 | length 758.9
  Top Layer w8: U5.112@2724.13,761.61 2764.57,761.61 2816,813.05 3163.25,813.05 3185.2,835 v1(3235,835) ; v1(3205,930) 3231.61,956.61 U4.9@3304.17,956.61
  Bottom Layer w8: v1(3205,930) 3205,865 v1(3235,835)
ADC_RX_SCK: U4.8 U5.120 | length 637.8
  Top Layer w8: U5.120@2724.13,919.09 2787.95,919.09 2810,897.05 3117.05,897.05 3175,955 3175,966.82 3198.18,990 3223.18,990 3230.98,982.2 U4.8@3304.17,982.2
ADC_RX_SDA: U4.10 U5.116 | length 617.6
  Top Layer w8: U5.116@2724.13,840.35 2724.83,841.05 2784.4,841.05 2798.4,855.05 3145.85,855.05 3171.3,880.5 3190.5,880.5 3241.02,931.02 U4.10@3304.17,931.02
ADC_RX_WS: U4.11 U5.114 | length 623.3
  Top Layer w8: U5.114@2724.13,800.98 2764.14,800.98 2804.2,841.05 3151.65,841.05 3177.1,866.5 3196.5,866.5 3235.43,905.43 U4.11@3304.17,905.43
AVDD: "Digital IO Higher Byte1.3" C1.2 C2.2 C3.2 C4.2 C5.2 C6.2 C10.2 C11.2 C57.1 C58.1 FB5.1 R3.2 U1.3 U1.6 U2.3 U2.6 U3.3 U3.6 U4.26 U7.3 | length 3286.6
  Top Layer w10: FB5.1@3083.62,1257.05 3127.05,1257.05 3135,1265 v2(3135,1285) ; U4.26@3575.83,1110.16 3617.6,1110.16 3665,1157.56 C10.2@3695,1157.56 ; v2(3675,245) 3705,275 3710,275 3719.41,284.41 U1.3@3748.58,284.41 ; C10.2@3685,1160 C11.2@3735,1160 3735.16,1160.16 v2(3780.16,1160.16) ; v2(3785,910) R3.2@3785,948.03 ; U1.6@3821.42,335.59 3829.69,343.86 C1.2@3829.69,385 v2(3865,385) ; v2(3875,245) 3900,270 C4.2@3900,275.31 3925.31,275.31 3934.41,284.41 U2.3@3948.58,284.41 ; U2.6@4021.42,335.59 4021.42,346.42 4029.69,354.69 C3.2@4029.69,385 v2(4060,385) ; v2(4075,245) 4100,270 C6.2@4100,275.31 4125.31,275.31 4134.41,284.41 U3.3@4148.58,284.41 ; U3.6@4221.42,335.59 4221.42,356.42 4229.69,364.69 C5.2@4229.69,385 v2(4265,385)
  Top Layer w20: C58.1@1438.07,555 C58.1@1475,555 ; v2(3145,1600) v2(3145,1760)
  Top Layer w25: U7.3@1345.83,684.45 1330,668.62 C57.1@1330,598.15 1373.15,555 C58.1@1438.07,555 ; C58.1@1475,555 v5(1585,665)
  Bottom Layer w20: 2680,2000 2734,2054 3101,2054 3130,2025 3130,1775 v2(3145,1760) ; v2(3135,1285) 3170,1320 3285,1320 3344.84,1260.16 3499.84,1260.16 3525,1235 v2(3550,1235) ; v2(3145,1600) 3145,1475 3275,1345 3350,1345 3405,1290 3500,1290 3515,1305 v2(3550,1305)
DAC_TX_MLCK: U4.5 U5.118 | length 762.8
  Top Layer w8: U5.118@2724.13,879.72 2787.73,879.72 2798.4,869.05 3140.05,869.05 3176.01,905 v1(3180,905) ; v1(3170,1005) 3170,1036.82 3192.16,1058.98 U4.5@3304.17,1058.98
  Bottom Layer w8: v1(3170,1005) 3170,985 3160,975 3160,945 3180,925 v1(3180,905)
DAC_TX_SCK: U4.4 U5.14 | length 1297.5
  Top Layer w8: U5.14@2383.58,1476.18 2383.58,1436.42 2405,1415 2440,1415 2625,1230 v1(2625,1030) ; v1(3165,1090) 3180,1075 3250,1075 3259.57,1084.57 U4.4@3304.17,1084.57
  Bottom Layer w8: v1(2625,1030) 2645,1010 3070,1010 3150,1090 v1(3165,1090)
DAC_TX_SDA: U4.6 U5.119 | length 681.3
  Top Layer w8: U5.119@2724.13,899.41 2787.84,899.41 2804.2,883.05 3123.05,883.05 v1(3205,965) ; v1(3205,1020) 3218.39,1033.39 U4.6@3304.17,1033.39
  Bottom Layer w8: v1(3205,965) v1(3205,1020)
DAC_TX_WS: U4.7 U5.113 | length 750
  Top Layer w8: U5.113@2724.13,781.3 2764.25,781.3 2810,827.05 3157.45,827.05 3182.9,852.5 3217.5,852.5 v1(3240,875) ; v1(3240,1005) 3255,1005 3257.8,1007.8 U4.7@3304.17,1007.8
  Bottom Layer w8: v1(3240,875) v1(3240,1005)
DIGI_0: "Digital IO Lower Byte1.8" U5.51 | length 2918.9
  Top Layer w8: U5.51@1865.87,1115.94 1969.06,1115.94 2003,1082 2483.4,1082 2525.4,1040 v1(2550,1040)
  Bottom Layer w8: v1(2550,1040) 2590,1040 2602.5,1052.5 2617.5,1052.5 2780,1215 2780,1411.82 3005.68,1637.5 3034.32,1637.5 3034.82,1637 3262,1637 3501,1876 4116,1876 4240,2000
DIGI_1: "Digital IO Lower Byte1.7" U5.49 | length 2814.5
  Top Layer w8: U5.49@1865.87,1155.31 1949.48,1155.31 2008.8,1096 2489.2,1096 2520.2,1065 v1(2575,1065)
  Bottom Layer w8: v1(2575,1065) 2576.5,1066.5 2611.7,1066.5 2766,1220.8 2766,1417.62 2999.88,1651.5 3040.12,1651.5 3040.62,1651 3256.2,1651 3495.2,1890 4030,1890 4140,2000
DIGI_2: "Digital IO Lower Byte1.6" U5.48 | length 2702
  Top Layer w8: U5.48@1865.87,1175 1949.6,1175 2014.6,1110 2495,1110 2515,1090 v1(2550,1090)
  Bottom Layer w8: v1(2550,1090) 2615.4,1090 2752,1226.6 2752,1423.42 2994.08,1665.5 3045.92,1665.5 3046.42,1665 3250.4,1665 3489.4,1904 3944,1904 4040,2000
DIGI_4: "Digital IO Lower Byte1.4" U5.46 | length 2478.5
  Top Layer w8: U5.46@1865.87,1214.37 1949.83,1214.37 2026.2,1138 2548,1138 v1(2550,1140)
  Bottom Layer w8: v1(2550,1140) 2625.8,1140 2724,1238.2 2724,1435.02 2982.48,1693.5 3057.52,1693.5 3058.02,1693 3238.8,1693 3477.8,1932 3772,1932 3840,2000
DIGI_7: "Digital IO Lower Byte1.1" U5.42 | length 2177.2
  Top Layer w8: U5.42@1865.87,1293.11 1931.89,1293.11 2045,1180 2490.4,1180 2525.4,1215 v1(2575,1215)
  Bottom Layer w8: v1(2575,1215) 2641.41,1215 2682,1255.59 2682,1452.41 2965.09,1735.5 3074.91,1735.5 3075.41,1735 3221.41,1735 3485,1998.59 3540,1998.59 3540,2000
DIGI_8: "Digital IO Higher Byte1.10" U5.11 | length 1438.4
  Top Layer w8: U5.11@2442.64,1476.18 2442.64,1429 2445.8,1429 2536.8,1338 2618,1338 2684.61,1404.61 2684.61,1405.91 2718.69,1440 2980.81,1440 3120,1579.19 3120,1820.2 3254.8,1955 3335,1955 3380,2000
DVDD: "Power & Reset1.2" "Power & Reset1.4" C8.2 C9.2 C27.2 C28.2 C32.1 C37.2 C38.2 C39.2 C40.2 C41.2 C42.2 C43.2 C44.2 C45.2 C46.2 C47.2 C48.2 C49.2 C60.2 C61.1 C71.2 DBGEN1.1 FB1.1 FB2.1 JTAG/DEBUG1.1@2120,1960 L3.2 R1.2 R2.2 R6.1 R7.1 R12.2 R17.2 R18.2 R21.2 R22.1 R40.1 R41.1 R42.1 R43.1 R44.1 R45.1 SD1.4 TRST1.1 U4.13 U5.5 U5.25 U5.36 U5.41 U5.59 U5.71 U5.77 U5.94 U5.107 U5.111 U5.127 U5.131 U5.141 U8.2 U9.6 | length 8404.8
  Top Layer w10: v2(455,1060) 480,1085 R40.1@505.47,1085 ; v2(465,1430) 495,1460 R45.1@505.47,1460 ; v2(465,1510) R44.1@505.47,1510 ; v2(504.53,995) R41.1@504.53,1034.06 ; R41.1@505,1034.53 R41.1@505.47,1035 ; v2(505,1175) 505.47,1174.53 R42.1@505.47,1135 ; v2(505,1370) 505.47,1370.47 R43.1@505.47,1410 ; C71.2@531.93,1275 689.53,1275 711.18,1253.35 SD1.4@765.28,1253.35 ; v2(565,1230.08) C71.2@565,1280.08 ; U9.6@1174.84,699.9 1174.84,712.34 v2(1205,742.5) ; TRST1.1@1330,1960 1290,1920 1290,1885 v2(1380,1885) ; R22.1@1515.47,1135 v2(1560,1135) ; v2(1545,1915) C28.2@1582.44,1877.56 ; v2(1750,720) 1790,720 1792.24,722.24 U5.71@1865.87,722.24 ; v2(1790,1260) C43.2@1790,1303.19 ; C42.2@1800,947.44 v2(1800,990) ; C42.2@1800,955 1820,955 1823.46,958.46 U5.59@1865.87,958.46 ; 1809.61,1312.8 U5.41@1865.87,1312.8 ; U5.36@1948.15,1476.18 1948.15,1545 v2(1980,1545) ; v2(1970,525) 2012.44,525 C40.2@2015,527.56 ; C40.2@2020,540 2020,550 2029.25,559.25 U5.77@2029.25,612.91 ; JTAG/DEBUG1.1@2120,1960 2120.31,1959.69 2220,1959.69 v2(2220,2005) ; C46.2@2157.5,1557.5 2167.05,1547.95 U5.25@2167.05,1476.18 ; C46.2@2165,1580 v1(2195,1550) ; v2(2325,515) 2363.9,515 U5.94@2363.9,612.91 ; v2(2540,1555) 2577.44,1555 C45.2@2587.44,1565 2587.44,1534.75 2560.75,1508.06 U5.5@2560.75,1476.18 ; U5.107@2619.8,617.91 2619.8,580.2 2640,560 C38.2@2640,552.56 ; C38.2@2640.31,555 v2(2685,555) ; U5.111@2724.13,741.93 2771.93,741.93 2785,755 C37.2@2812.44,755 2812.44,777.44 v1(2825,790) ; U5.127@2724.13,1056.89 2781.89,1056.89 2800,1075 C49.2@2820,1075 ; U5.131@2724.13,1135.63 C48.2@2816.81,1135.63 ; U5.141@2724.13,1332.48 C47.2@2802.48,1332.48 ; C47.2@2800,1330 C47.2@2802.48,1332.48 ; C49.2@2820,1077.44 v2(2820,1175) ; v2(2820,1370) 2820,1350 C47.2@2802.48,1332.48 ; R12.2@2914.53,390 2935,390 v1(2950,375) ; U4.13@3304.17,854.25 3351.06,854.25 3369.16,836.16 3369.16,774.47 C8.2@3340,745.31 C9.2@3340,695.31 3340,695 v2(3305.16,660.16) ; v2@3440.63,700.63 R1.2@3440.63,745.16 ; v2@3599.69,700.63 R2.2@3599.69,745.16
  Top Layer w15: v2(3350,1300) R6.1@3389.53,1300 ; R7.1@3445,1299.53 v2(3445,1335)
  Top Layer w25: C61.1@940,795.57 940,827.5 1015,902.5 v3(1041.52,902.5)
  Bottom Layer w10: v1(1940,1810) R17.2@1940,1844.53 ; v1(2130,1810) R18.2@2130,1849.53 ; v2(2340,1230) FB1.1@2340,1276.38 ; v2(2435,1230) FB2.1@2435,1276.38 ; v2(3300,795) 3300,770 3369.84,700.16 v2(3440.16,700.16) v2(3600.16,700.16)
  Bottom Layer w25: v5(430,920) 335,920 316,901 117.16,901 48.5,832.34 48.5,296.5 206,139 1300.16,139 1387.84,226.68 1550.52,226.68 1583.84,260 2647.32,260 2659.29,248.03 2659.89,248.03 2759.92,148 2802.78,148 ; v2(985,742.5) 1015,772.5 1175,772.5 v2(1205,742.5) ; 2802.81,148.03 2877.19,148.03 ; 2940,100 2892,148 2877.22,148 3020.08,148 ; 3020.11,148.03 3091.97,148.03 3140,100
GND: "Digital IO Higher Byte1.4" "Power & Reset1.6" "Power & Reset1.7" "USER STATUS.1" C1.1 C2.1 C3.1 C4.1 C5.1 C6.1 C7.1 C8.1 C9.1 C12.1 C13.1 C16.1 C17.1 C18.1 C19.1 C21.1 C23.1 C24.1 C25.1 C27.1 C28.1 C29.1 C30.2 C31.1 C32.2 C35.1 C36.1 C37.1 C38.1 C39.1 C40.1 C41.1 C42.1 C43.1 C44.1 C45.1 C46.1 C47.1 C48.1 C49.1 C50.1 C51.2 C52.2 C53.2 C54.1 C55.1 C56.2 C57.2 C58.2 C59.1 C60.1 C61.2 C62.1 C63.1 C64.1 C65.2 C68.1 C71.1 C72.1 C73.1 C74.1 FB3.2 FB4.2 FB6.1 FB12.2 FB13.2 FB14.2 FB15.2 FB16.1 FB17.2 J3.5 JTAG/DEBUG1.3 JTAG/DEBUG1.5 JTAG/DEBUG1.9 pad.@850,2000 R8.1 R11.1 R14.1 R16.1 R20.1 R29.2 R32.2 R33.2 R47.1 RESET1.2 SD1.6 SD1.9 SD1.10 SD1.11 SD1.12 STATUS.1 U4.12 U4.21 U5.4 U5.40 U5.76 U5.109 U6.4 U6.14 U6.15 U6.17 U7.2 U7.4 U8.4 U9.1 U9.4 U9.5 U9.9 U10.3 X1.2 X1.4 | length 7378.8
  Top Layer w10: J3.5@219.04,1901.18 250.22,1901.18 274.04,1925 274.04,2013.78 v2(305,2044.74) ; R32.2@315.57,1943.54 v2(315.57,1988.46) ; R33.2@315.83,1759.74 v2(360,1759.74) ; v2(369.53,1230) 369.53,1255 ; C68.1@413.03,1714.27 C68.1@415,1712.3 ; v2(635,1145) 637.05,1147.05 SD1.11@686.54,1147.05 ; v2(640,1400) 683.58,1400 SD1.12@686.54,1402.95 ; SD1.6@765.28,1339.96 765.32,1340 v2(825,1340) ; v1(980,2000) STATUS.1@1019.13,2000 ; SD1.9@1220,1145 v2@1220,1205.08 ; SD1.10@1220,1434.45 v2(1220,1490) ; v2(1245,1820) C27.1@1287.56,1820 ; v2(1420,1135) R47.1@1464.53,1135 ; R14.1@1489.53,1875 1489.53,1899.53 1500,1910 v2(1500,1920) ; v2(1542.44,1822.44) C28.1@1585,1822.44 ; U10.3@1565,1302.48 1565,1260 v2(1590,1235) ; v2(1695,1305) C43.1@1737.44,1305 ; v2(1700,945) C42.1@1742.44,945 ; R16.1@1784.53,1875 1784.53,1894.53 1795,1905 v2(1795,1920) ; v2(1795,620) C41.1@1795,662.44 ; U5.40@1865.87,1332.48 1897.52,1332.48 1910,1320 v2(1935,1320) ; C44.1@1885,1547.44 v2(1885,1590) ; U5.76@2009.57,617.91 2009.57,669.57 v2(2025,685) ; v2(2015,430) C40.1@2015,472.44 ; v1(2105,1655) 2105,1625 C46.1@2115.51,1614.49 ; C32.2@2225,1907.44 v2(2270,1907.44) ; C30.2@2245,1757.56 v2(2245,1800) ; X1.2@2337.52,1710 v2(2400,1710) ; C39.1@2372.44,460 v2(2415,460) ; X1.4@2495,1615.51 v2(2495,1660) ; v2@2580.43,1405 U5.4@2580.43,1476.18 ; C31.1@2592.56,1700 v2(2635,1700) ; v2(2640,455) C38.1@2640,507.36 ; C45.1@2640,1567.56 v2(2640,1610) ; U5.109@2724.13,700.2 2781.85,700.2 v1(2800,682.05) ; C47.1@2852.56,1330 v2(2885,1330) ; RESET1.2@2868.39,680 v1(2930,680) ; C37.1@2869.69,750 v1(2905,750) ; C49.1@2877.56,1075 2877.56,1130 v2(2925,1130) ; C29.1@2912.56,440 2935,462.44 v1(2935,480) ; C35.1@3055,940 v2(3100,940) ; C36.1@3060,1102.56 3062.56,1100 v2(3100,1100) ; v2(3083.62,1173.43) FB6.1@3083.62,1207.05 ; RESET1.2@3220,682.72 v1(3220,730) ; U4.12@3304.17,879.84 3350.47,879.84 3385.16,845.16 3385.16,755.28 C8.1@3395.12,745.31 C9.1@3395.12,695.31 v2@3395.12,650.2 ; 3454.13,475 3480,475 3490,465 v1(3490,455) ; U4.21@3575.83,982.2 3642.8,982.2 3677.44,947.56 3727.44,947.56 C13.1@3735,940 ; C23.1@3613.31,1570 v2(3655,1570) ; v2(3665,315) 3699.69,315 C2.1@3700,314.68 ; C18.1@3735,797.44 C19.1@3785,797.44 ; C13.1@3735,950 3757.81,972.81 3812.19,972.81 C17.1@3835,950 v2(3880,950) ; FB17.2@3785,1111.18 3831.06,1111.18 C16.1@3835,1115.12 3845.04,1125.16 v2(3895.16,1125.16) ; C19.1@3787.44,795 v2(3830,795) ; v2(3790,420) 3790,385.32 C1.1@3790.31,385 ; FB13.2@3838.78,1215.16 v2(3885.16,1215.16) ; v2(3865,315) 3899.69,315 C4.1@3900,314.68 ; v2(3990,420) 3990,385.32 C3.1@3990.31,385 ; v2(4065,315) 4099.69,315 C6.1@4100,314.68 ; FB14.2@4180,1496.69 FB14.2@4181.69,1495 ; v2(4190,420) 4190,385.32 C5.1@4190.31,385
  Top Layer w15: R29.2@365,1714.27 C68.1@413.03,1714.27 ; C68.1@415,1712.3 v2(415,1754.74) ; v2(895,957.5) C61.2@945,957.5 ; v2(1420,1635) C62.1@1462.56,1635 ; C62.1@1465,1632.56 C63.1@1515,1632.56 ; C64.1@1622.56,1580 1622.56,1552.44 v2(1665,1510) ; C21.1@3353.31,1500 v2(3395,1500) ; v2(3805,620) 3805,590 3835,560 FB15.2@3851.69,560 ; FB14.2@4180,1496.69 v2(4180,1550)
  Top Layer w20: FB12.2@149.2,1634.02 v2(200,1634.01)
  Top Layer w25: FB16.1@698.31,80 v6(750,80) ; U7.2@1345.83,775 1420,775 1450,745 v3(1450,715) ; U7.4@1574.17,775 v3(1655,775)
  Bottom Layer w10: v2(2175,1230) R8.1@2175,1270.47 ; v2(2230,1230) FB3.2@2230,1277.01 ; FB4.2@2283.62,1277.05 FB4.2@2285,1278.43 ; v2(2285,1230) FB4.2@2285,1276.38 ; v2(2385,1255) C25.1@2385,1292.36 ; v2(2480,1250) C24.1@2480,1290.32
  Bottom Layer w25: v6(750,80) 775,105 1310,105 1400.68,195.68 1544.32,195.68 1590,150 2100,150 2200,50 3290,50 3340,100 3440,100
  other v1: 955,517.5 985,517.5 955,547.5 985,547.5 1220,802.5 1250,802.5 1220,832.5 1250,832.5
  other v2: 3395.16,650.16 1219.53,1205 2580,1405
  other v3: 1620,500
  other v4: -495,600 -455,600 -495,640 -455,640 1149.25,662.5 1180.75,662.5
I2C_CLK: R1.1 U4.17 U5.88 | length 1846.7
  Top Layer w8: U5.88@2245.79,617.91 2245.79,449.21 v1(2255,440) ; v1(3467.72,595) 3499.69,626.96 R1.1@3499.69,745.16 3499.69,849.68 3529.84,879.84 U4.17@3575.83,879.84
  Bottom Layer w8: v1(2255,440) 2282.5,412.5 2297.7,412.5 2308.2,402 2865.58,402 2891.58,428 3043,428 3165,550 3422.72,550 v1(3467.72,595)
I2C_DATA: R2.1 U4.16 U5.87 | length 1890.4
  Top Layer w8: U5.87@2226.1,617.91 2226.1,433.9 v1(2260,400) ; v1(3507.72,600) 3540.16,632.44 R2.1@3540.16,745.16 ; R2.1@3535.16,755.16 3535.16,765.16 3515.69,784.63 3515.69,840.68 3529.25,854.25 U4.16@3575.83,854.25
  Bottom Layer w8: v1(2260,400) 2261.5,398.5 2291.9,398.5 2302.4,388 2871.38,388 2897.38,414 3048.8,414 3170.8,536 3441.9,536 3505.9,600 v1(3507.72,600)